# EAGLE board digital lockin2 (EAGLE 9.6.2)
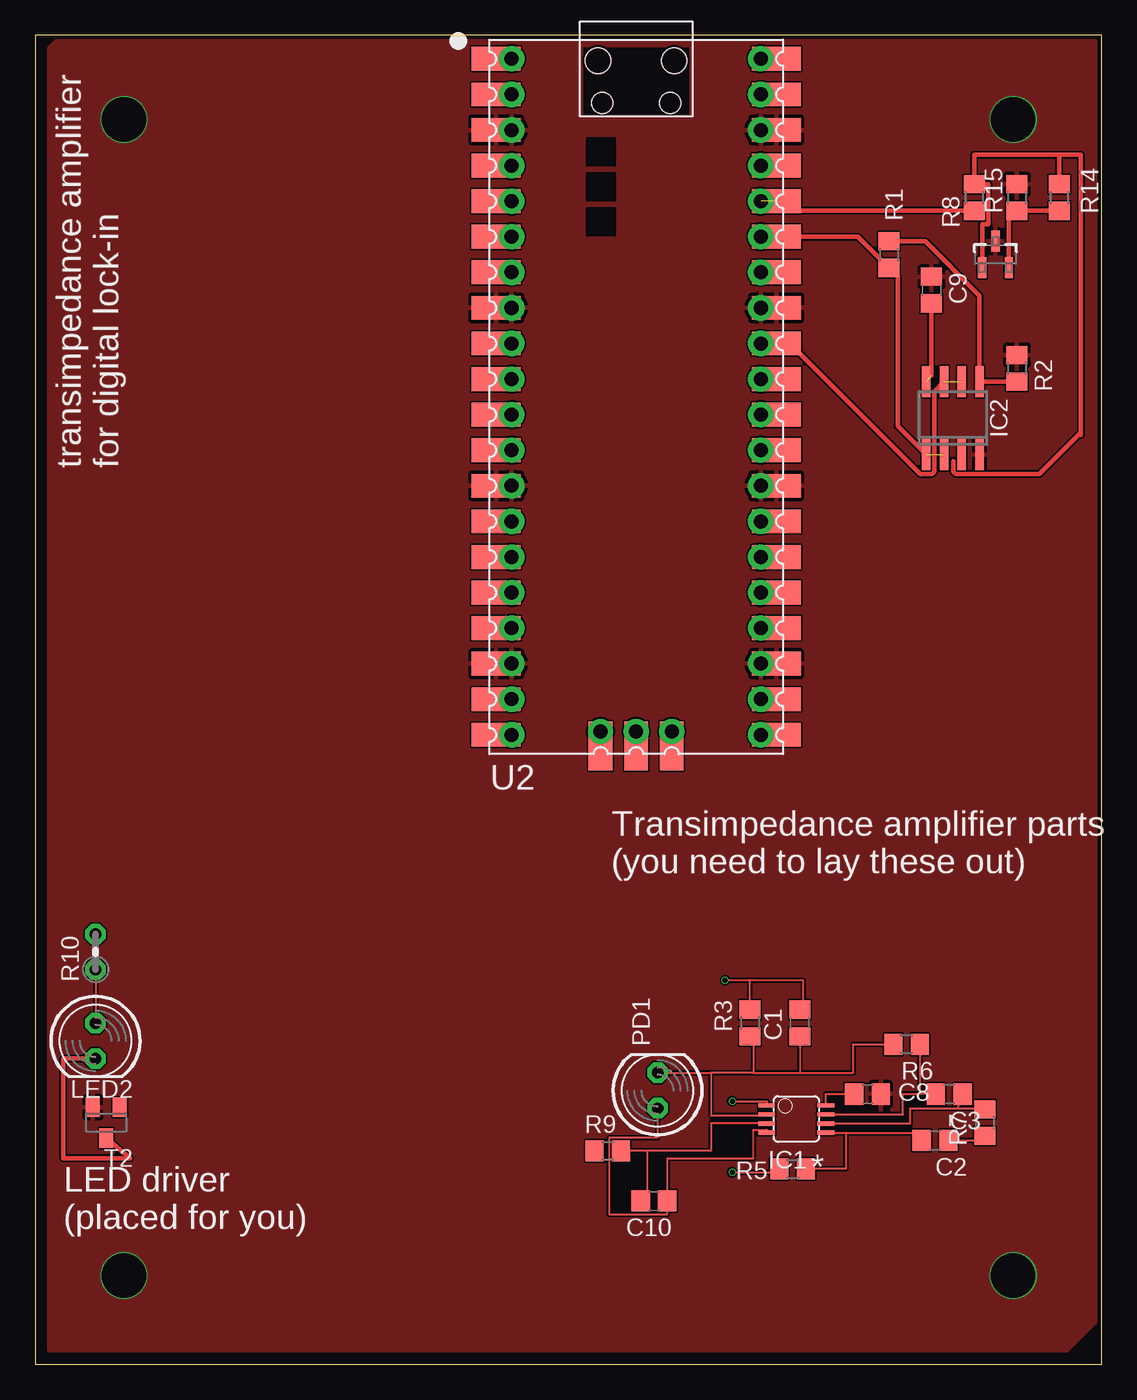
[diagram p0: board, top side]
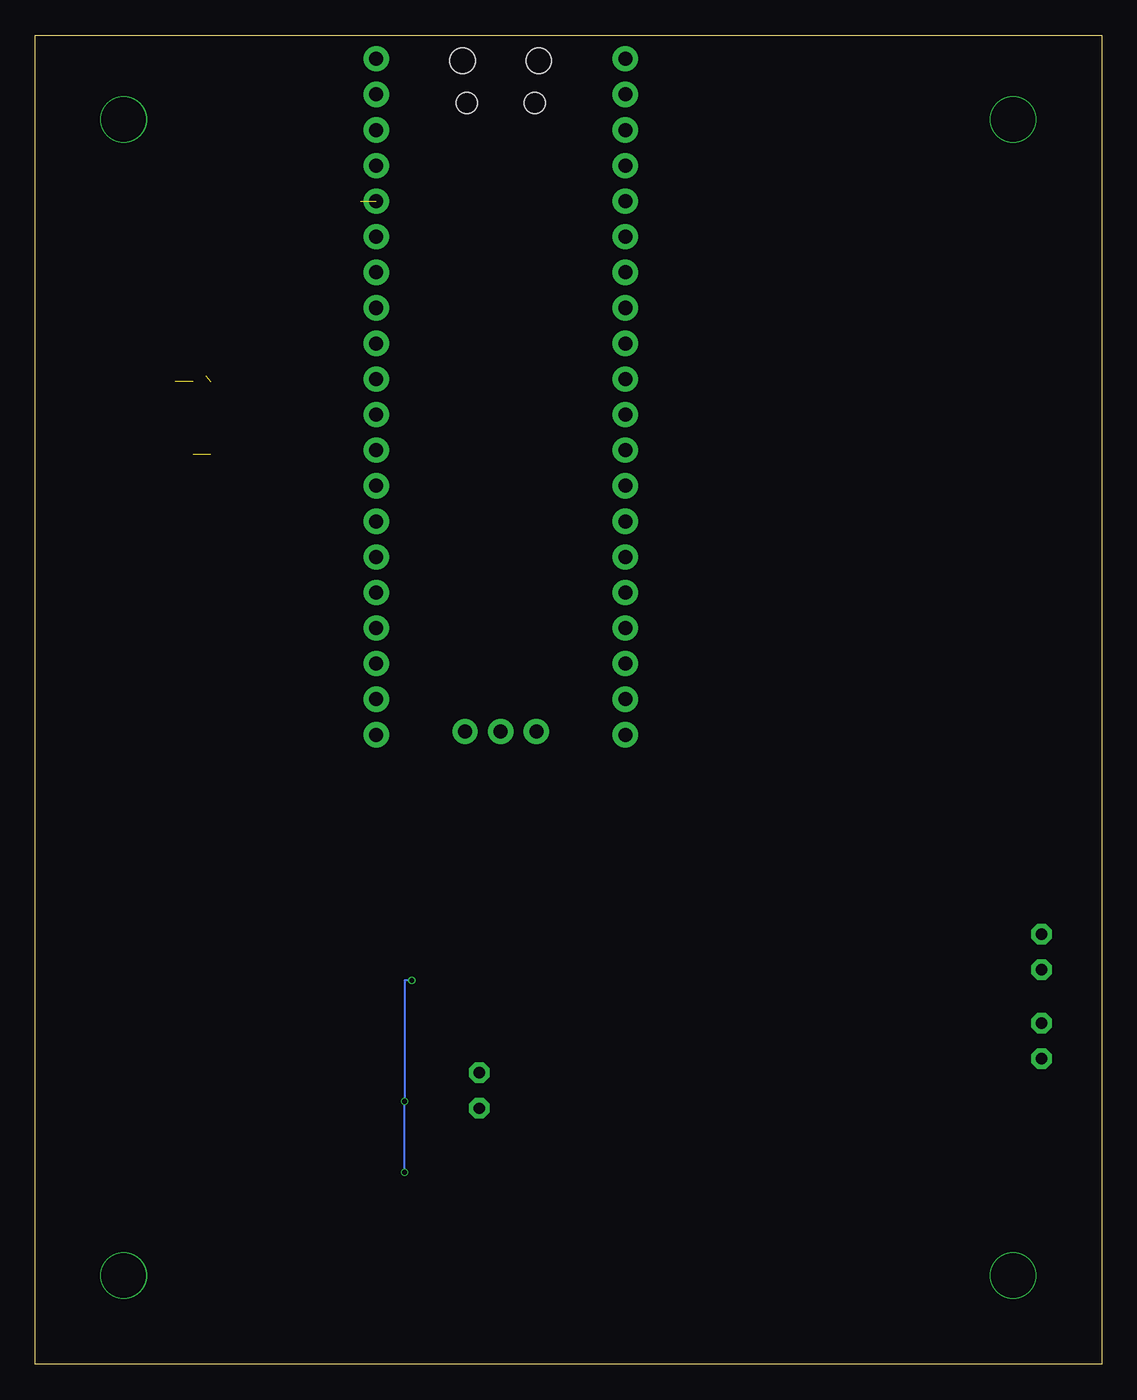
[diagram p1: board, bottom side, seen from below]

Size 76.18 x 94.92 mm. Coordinates in mm from the lower left corner, seen from the top.
Outline: 0,0 76.18,0 76.18,94.92 0,94.92 0,0
Copper layers (1*16): Top 0.035mm / dielectric 1.6mm / Bottom 0.035mm
Design rules "jlcpcb-2layers": minimum track width 5mil, minimum drill 0.3mm, track to track 5mil, track to pad 5mil, pad to pad 5mil, via to via 5mil, smd to smd 5mil, copper to edge 0.2mm, drill to drill 6mil, minimum pad ring 10mil, minimum via ring 3mil, stop-mask expansion 4mil, vias tented up to drill 0mil, thermal gap 10mil
Net classes: 1 power: width 0.305 mm

## Footprints (pad centres in the part's own frame; a part is rotated, then mirrored left to right if it is on the bottom)
C0805 = smd 1.3 x 1.5: 1 -0.95,0; 2 0.95,0
MSOP08 = smd 0.3 x 1.2: 1 -0.976,-2.113; 2 -0.326,-2.113; 3 0.324,-2.113; 4 0.974,-2.113; 5 0.974,2.112; 6 0.324,2.112; 7 -0.326,2.112; 8 -0.976,2.112
SO08 = smd 0.6 x 2.2: 1 -1.905,-2.6; 2 -0.635,-2.6; 3 0.635,-2.6; 4 1.905,-2.6; 5 1.905,2.6; 6 0.635,2.6; 7 -0.635,2.6; 8 -1.905,2.6
LED5MM = drill 0.813 octagon: A -1.27,0; K 1.27,0
R0805 = smd 1.3 x 1.5: 1 -0.95,0; 2 0.95,0
0204V = drill 0.813 octagon: 1 -1.27,0; 2 1.27,0
SOT23-BEC = smd 1 x 1.4: B -0.95,-1.1; C 0,1.1; E 0.95,-1.1
PICO-PKG = drill 1: 1 -8.89,24.13; 2 -8.89,21.59; 3 -8.89,19.05; 4 -8.89,16.51; 5 -8.89,13.97; 6 -8.89,11.43; 7 -8.89,8.89; 8 -8.89,6.35; 9 -8.89,3.81; 10 -8.89,1.27; 11 -8.89,-1.27; 12 -8.89,-3.81; 13 -8.89,-6.35; 14 -8.89,-8.89; 15 -8.89,-11.43; 16 -8.89,-13.97; 17 -8.89,-16.51; 18 -8.89,-19.05; 19 -8.89,-21.59; 20 -8.89,-24.13; 21 8.89,-24.13; 22 8.89,-21.59; 23 8.89,-19.05; 24 8.89,-16.51; 25 8.89,-13.97; 26 8.89,-11.43; 27 8.89,-8.89; 28 8.89,-6.35; 29 8.89,-3.81; 30 8.89,-1.27; 31 8.89,1.27; 32 8.89,3.81; 33 8.89,6.35; 34 8.89,8.89; 35 8.89,11.43; 36 8.89,13.97; 37 8.89,16.51; 38 8.89,19.05; 39 8.89,21.59; 40 8.89,24.13; 41 -2.54,-23.9; 42 0,-23.9; 43 2.54,-23.9 | smd 3.5 x 1.7: P$1 -10,24.13; P$2 -10,21.59; P$3 -10,19.05; P$4 -10,16.51; P$5 -10,13.97; P$6 -10,11.43; P$7 -10,8.89; P$8 -10,6.35; P$9 -10,3.81; P$10 -10,1.27; P$11 -10,-1.27; P$12 -10,-3.81; P$13 -10,-6.35; P$14 -10,-8.89; P$15 -10,-11.43; P$16 -10,-13.97; P$17 -10,-16.51; P$18 -10,-19.05; P$19 -10,-21.59; P$20 -10,-24.13; P$21 10,-24.13; P$22 10,-21.59; P$23 10,-19.05; P$24 10,-16.51; P$25 10,-13.97; P$26 10,-11.43; P$27 10,-8.89; P$28 10,-6.35; P$29 10,-3.81; P$30 10,-1.27; P$31 10,1.27; P$32 10,3.81; P$33 10,6.35; P$34 10,8.89; P$35 10,11.43; P$36 10,13.97; P$37 10,16.51; P$38 10,19.05; P$39 10,21.59; P$40 10,24.13 | smd 1.7 x 3.5: P$41 -2.54,-24.925; P$42 0,-24.925; P$43 2.54,-24.925 | hole 1.8: -2.725,24; 2.725,24 | hole 1.5: -2.425,20.97; 2.425,20.97
DBZ0003A_N = smd 1.5 x 0.6: 1 0.95,-0.95; 2 0.95,0.95; 3 -0.95,0

## Placement (x,y rotation side)
C1  5 pF  [C0805]  54.61,24.38 90 top
C2  0.1 uF  [C0805]  64.26,16 0 top
C3  0.1 uF  [C0805]  65.28,19.3 0 top
C8  0.1 uF  [C0805]  59.44,19.3 0 top
C9  0.1 uF  [C0805]  64.01,76.71 270 top
C10  0.1 uF  [C0805]  44.2,11.68 180 top
IC1  OPA2650E  [MSOP08]  54.36,17.53 270 top
IC2  LM358D  [SO08]  65.53,67.56 0 top
LED2  DNP  [LED5MM]  4.32,23.11 270 top
PD1  DNP  [LED5MM]  44.45,19.56 90 top
R1  1k  [R0805]  60.96,79.25 270 top
R2  1k  [R0805]  70.1,71.12 270 top
R3  1M  [R0805]  51.05,24.38 270 top
R5  1M  [R0805]  54.1,13.97 0 top
R6  100k  [R0805]  62.23,22.86 180 top
R7  1M  [R0805]  67.82,17.27 270 top
R8  1 k  [R0805]  67.06,83.31 270 top
R9  100k  [R0805]  40.89,15.24 180 top
R10  DNP  [0204V]  4.32,29.46 90 top
R14  1 k  [R0805]  73.15,83.31 90 top
R15  5k  [R0805]  70.1,83.31 270 top
T2  NPN  [SOT23-BEC]  5.08,17.27 180 top
U2  RASPBERRY_PICOSMD-TH  [PICO-PKG]  42.93,69.09 0 top
U5  TL431AIDBZR  [DBZ0003A_N]  68.58,79.25 270 top

## Library data of the parts
C1 = rcl; SPICEPREFIX: C
C2 C3 C8-C10 = rcl; LCSC_PART#: C28233; SPICEPREFIX: C
IC1 = burr-brown; ACTUAL_PART: OPA2381; LCSC_PART#: C181662; OC_FARNELL: unknown; OC_NEWARK: unknown
IC2 = linear; LCSC_PART#: C7950
LED2 PD1 = led
R1 R2 R8 R14 = rcl; LCSC_PART#: C17513; SPICEPREFIX: R
R3 R5 R7 = rcl; LCSC_PART#: C17514; SPICEPREFIX: R
R6 R9 = rcl; LCSC_PART#: C149504; SPICEPREFIX: R
R10 R15 = rcl; SPICEPREFIX: R
T2 = transistor; LCSC_PART#: C2145
U2 = RpiPico
U5 = tl431; COPYRIGHT: Copyright (C) 2025 Ultra Librarian. All rights reserved.; LCSC_PART#: C3113; MANUFACTURER_PART_NUMBER: TL431AIDBZR; MFR_NAME: Texas Instruments; REFDES: RefDes; TYPE: TYPE

## Nets
3V3 [power]: R8.2 U2.36 U2.P$36
5V [power]: C9.2 IC2.8
ADCMID: IC2.6 IC2.7 U2.32 U2.P$32
ADCREF: IC2.1 IC2.2 R1.2 U2.35 U2.P$35
AMPOUT: U2.31 U2.P$31
GND [power]: C8.2 C9.1 IC2.4 R2.1 R15.1 T2.E U2.3 U2.8 U2.13 U2.18 U2.23 U2.28 U2.33 U2.38 U2.P$3 U2.P$8 U2.P$13 U2.P$18 U2.P$23 U2.P$28 U2.P$33 U2.P$38 U5.3
LEDCTRL: U2.27 U2.P$27
N$1: C3.1 IC1.7 R6.1
N$2: C3.2 IC1.6 R7.1
N$3: LED2.K T2.C
N$4: C2.2 R7.2
N$5: C2.1 IC1.5 R5.2
N$6: C1.2 IC1.1 R3.1 R5.1
N$7: C1.1 IC1.2 PD1.K R3.2 R6.2
N$8: C10.2 IC1.3 R9.1
N$9: R8.1 R14.2 U5.1
N$10: IC2.5 R1.1 R2.2
N$11: C10.1 IC1.4 PD1.A
N$12: LED2.A R10.1
N$13: C8.1 IC1.8
N$20: R14.1 R15.2 U5.2
S$1 [power]: U2.40 U2.P$40
SWGND: U2.42 U2.P$42
VSYS: U2.39 U2.P$39

## Tracks (layer width: path | path; a pad name or v marks a point on that pad's centre or on a via)
3V3  (1 unrouted)
  Top 0.305: R8.2 52.93,82.36 U2.P$36
5V  (1 unrouted)
  Top 0.305: 64.01,70.61 C9.2
ADCMID  (1 unrouted)
  Top 0.305: U2.P$32 53.9,72.9 63.21,63.59 64.04,63.59 64.21,63.75 64.21,69.47 IC2.7
ADCREF  (1 unrouted)
  Top 0.305: IC2.1 61.59,67 61.59,77.66 60.99,78.27 R1.2 58.74,80.52 U2.P$35
GND  (via drill 3.17)
  other vias: 69.85,6.35 6.35,6.35 6.35,88.9 69.85,88.9
  pour Top: 1.02,1.02 73.66,1.02 75.69,3.05 75.69,94.49 1.52,94.49 1.02,93.98
N$1
  Top 0.152: R6.1 63.18,19.3 | C3.1 64.01,19.3 63.18,19.3 | IC1.7 59.94,17.85 60.13,17.85 61.98,17.85 61.98,19.3 63.18,19.3
N$2
  Top 0.152: IC1.6 62.48,17.2 62.48,18.29 65.89,18.29 | 65.89,18.29 67.82,18.29 R7.1 | 65.89,18.29 C3.2
N$3
  Top 0.305: T2.C 6.78,14.73 2.03,14.73 2.03,21.84 LED2.K
N$4
  Top 0.152: C2.2 67.82,16 R7.2
N$5
  Top 0.152: IC1.5 57.91,16.55 | 57.91,16.55 63.31,16.55 C2.1 | 57.91,16.55 57.91,13.97 R5.2
N$6  (via drill 0.35)
  Top 0.152: R3.1 51.05,27.43 | 51.05,27.43 54.86,27.43 54.86,25.33 C1.2 | 51.05,27.43 v49.28,27.43 | v49.78,13.72 53.15,13.72 R5.1 | v49.78,18.8 52.24,18.8 IC1.1
  Bottom 0.152: v49.28,27.43 49.78,27.43 v49.78,18.8 v49.78,13.72
N$7
  Top 0.152: 52.17,17.78 IC1.2 52.24,17.78 48.26,17.78 48.26,20.83 | PD1.K 48.26,20.83 | R3.2 51.31,23.43 51.31,20.83 | 51.31,20.83 54.61,20.83 | C1.1 54.61,20.83 | 51.31,20.83 48.26,20.83 | 54.61,20.83 58.42,20.83 58.42,22.86 R6.2
N$8
  Top 0.152: IC1.3 48.26,17.2 48.26,15.24 43.69,15.24 | 43.69,15.24 R9.1 | C10.2 43.69,12.13 43.69,15.24
N$9
  Top 0.305: U5.1 67.63,81.43 68.08,81.43 68.08,84.26 R8.1 67.06,86.36 73.15,86.36 | R14.2 73.15,86.36 | 73.15,86.36 74.68,86.36 74.68,66.55 | 74.68,66.55 74.68,66.36 | 65.59,64.52 65.59,63.75 65.75,63.59 71.71,63.59 74.68,66.55
N$10
  Top 0.305: R2.2 IC2.5 | IC2.5 | R1.1 63.57,80.2 67.44,76.33 IC2.5
N$11
  Top 0.152: PD1.A 44.45,16.19 40.99,16.19 40.99,10.73 45.15,10.73 C10.1 45.15,14.73 51.31,14.73 51.31,16.76 52.24,16.76 IC1.4
N$12
  Top 0.152: R10.1 LED2.A
N$13
  Top 0.152: IC1.8 56.47,19.3 C8.1
N$20
  Top 0.305: U5.2 69.53,82.36 R15.2 R14.1

## Text on the board
tPlace: TIPS: / turn off the ground airwires / command: ratsnest ! GND / "untangle" the remaining airwires as best you can / (see voltage ref for an example) / pour a ground plane on both sides / (use polygon on top layer(1) and then polygon on bottom layer (16) , type GND for the net name) / then use ripup/visible polygons so you can see what you're doing again / Tools->Autorouter will attempt to route the board automatically / If you do by hand, make one layer horizontal (e.g. top) wires / and one layer (e.g. bottom) vertical wires. / Use the middle mouse button to switch layers while drawing and insert a via automatically / At power supply GND and bypass capacitor grounds, try to make a short stub and then add a via (middle mouse button) / then hit esc to end on the via / this will make a connection to the ground plane on both sides of the board / After you autoroute, type ratsnest to fill the polygons and run a DRC to check for airwires. / Usually these are on the ground plane. / Add vias to ground (see above) where needed and on power supply pins/bypass caps | Transimpedance amplifier parts / (you need to lay these out) | LED driver / (placed for you) | I have already done this, but to make the autorouter draw thick power wires (so they can carry current), use edit->net classes / to set the power nets and then rules to say a minimum width (here 12)
tNames: transimpedance amplifier / for digital lock-in | *